# Altium PCB LED_Ring_80mm.pcbdoc (part 1 of 3)
Units mm, origin at the board's own origin, x right, y up, seen from the top; angles counter-clockwise.
Board outline 95 x 95 mm, 2 copper layers (Top Layer, Bottom Layer), stack 1.071 mm thick; 20 components, 18 nets, 2525 pads, 18 vias.
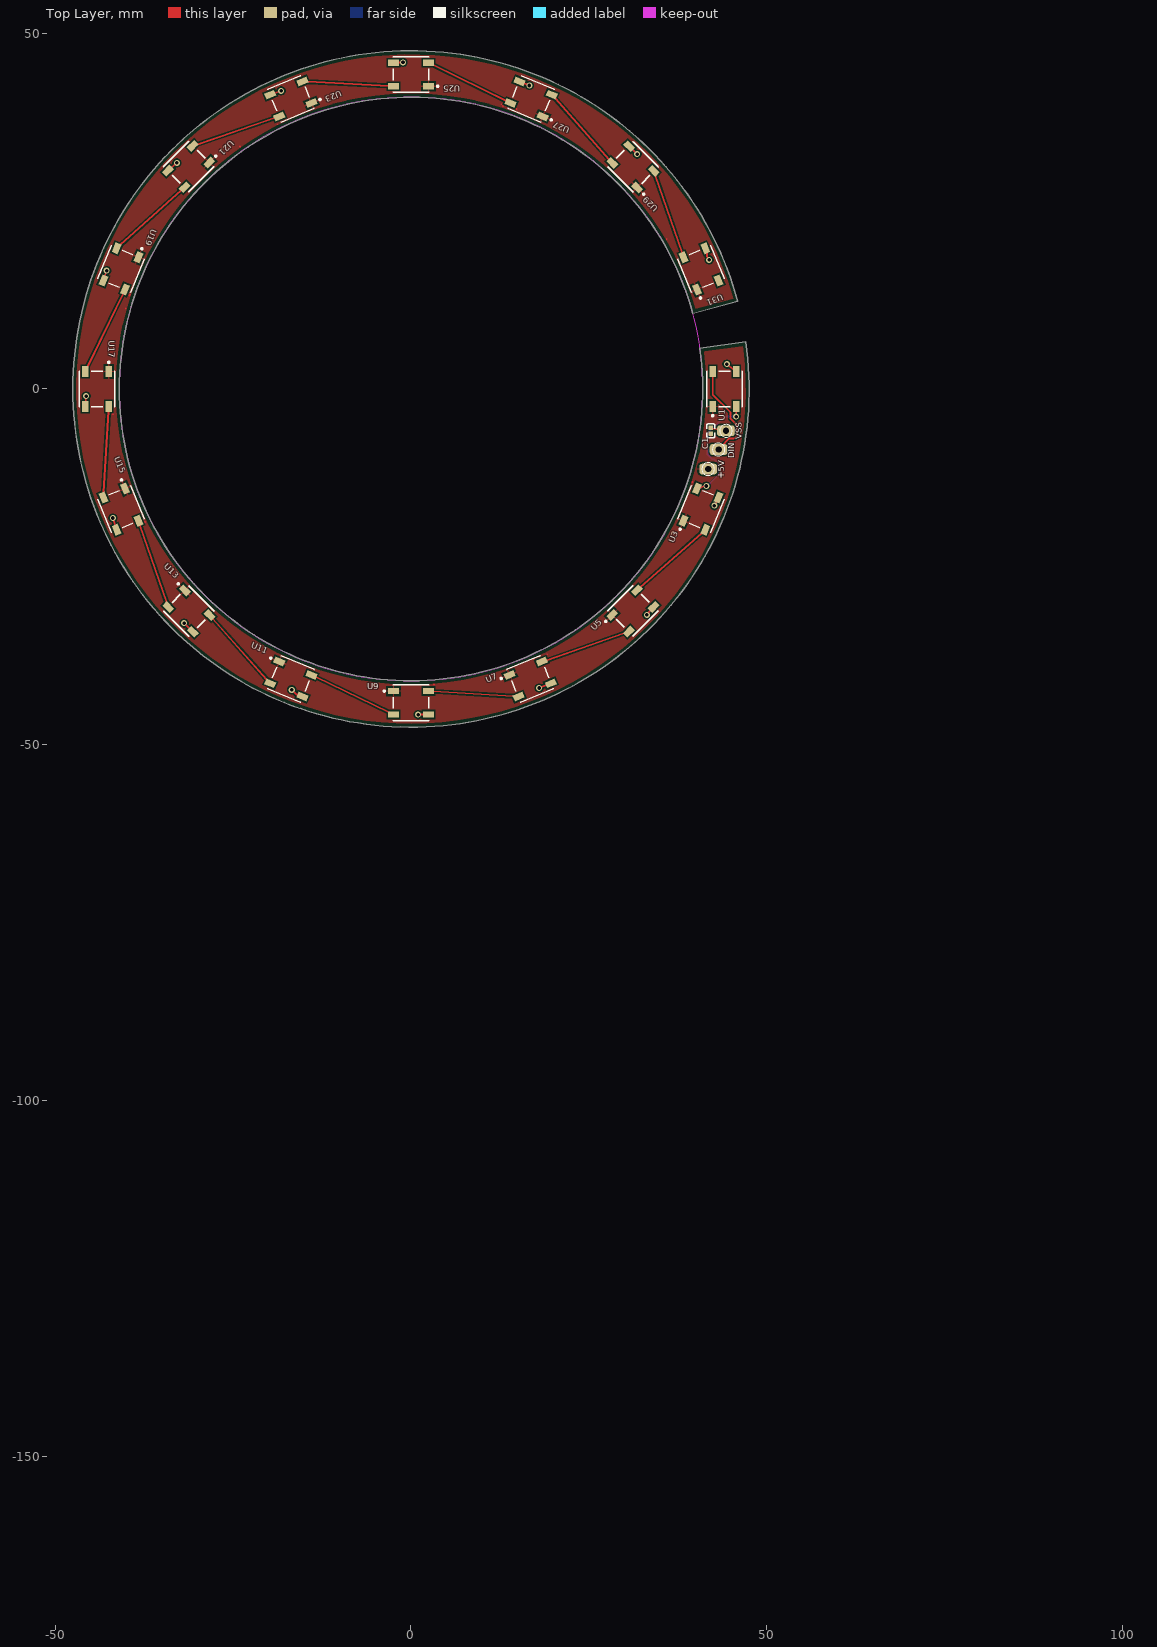
[diagram p0: Top Layer view]
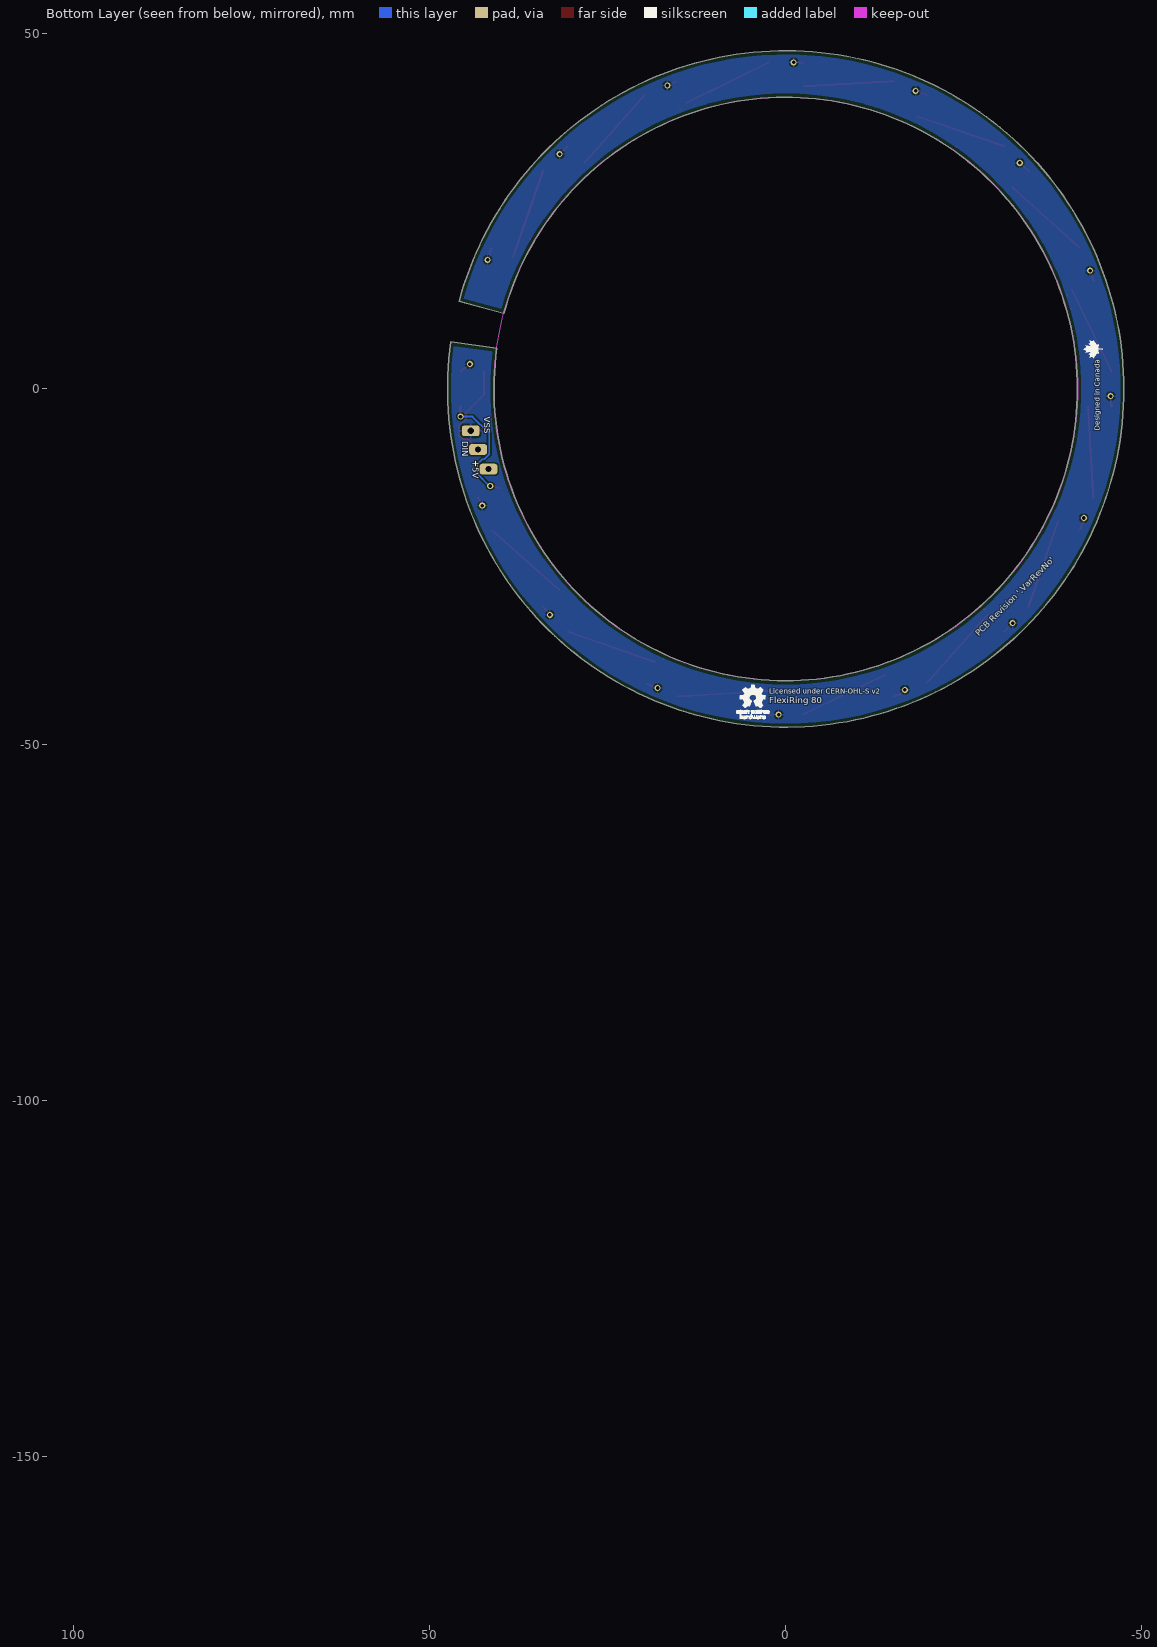
[diagram p1: Bottom Layer view, seen from below]
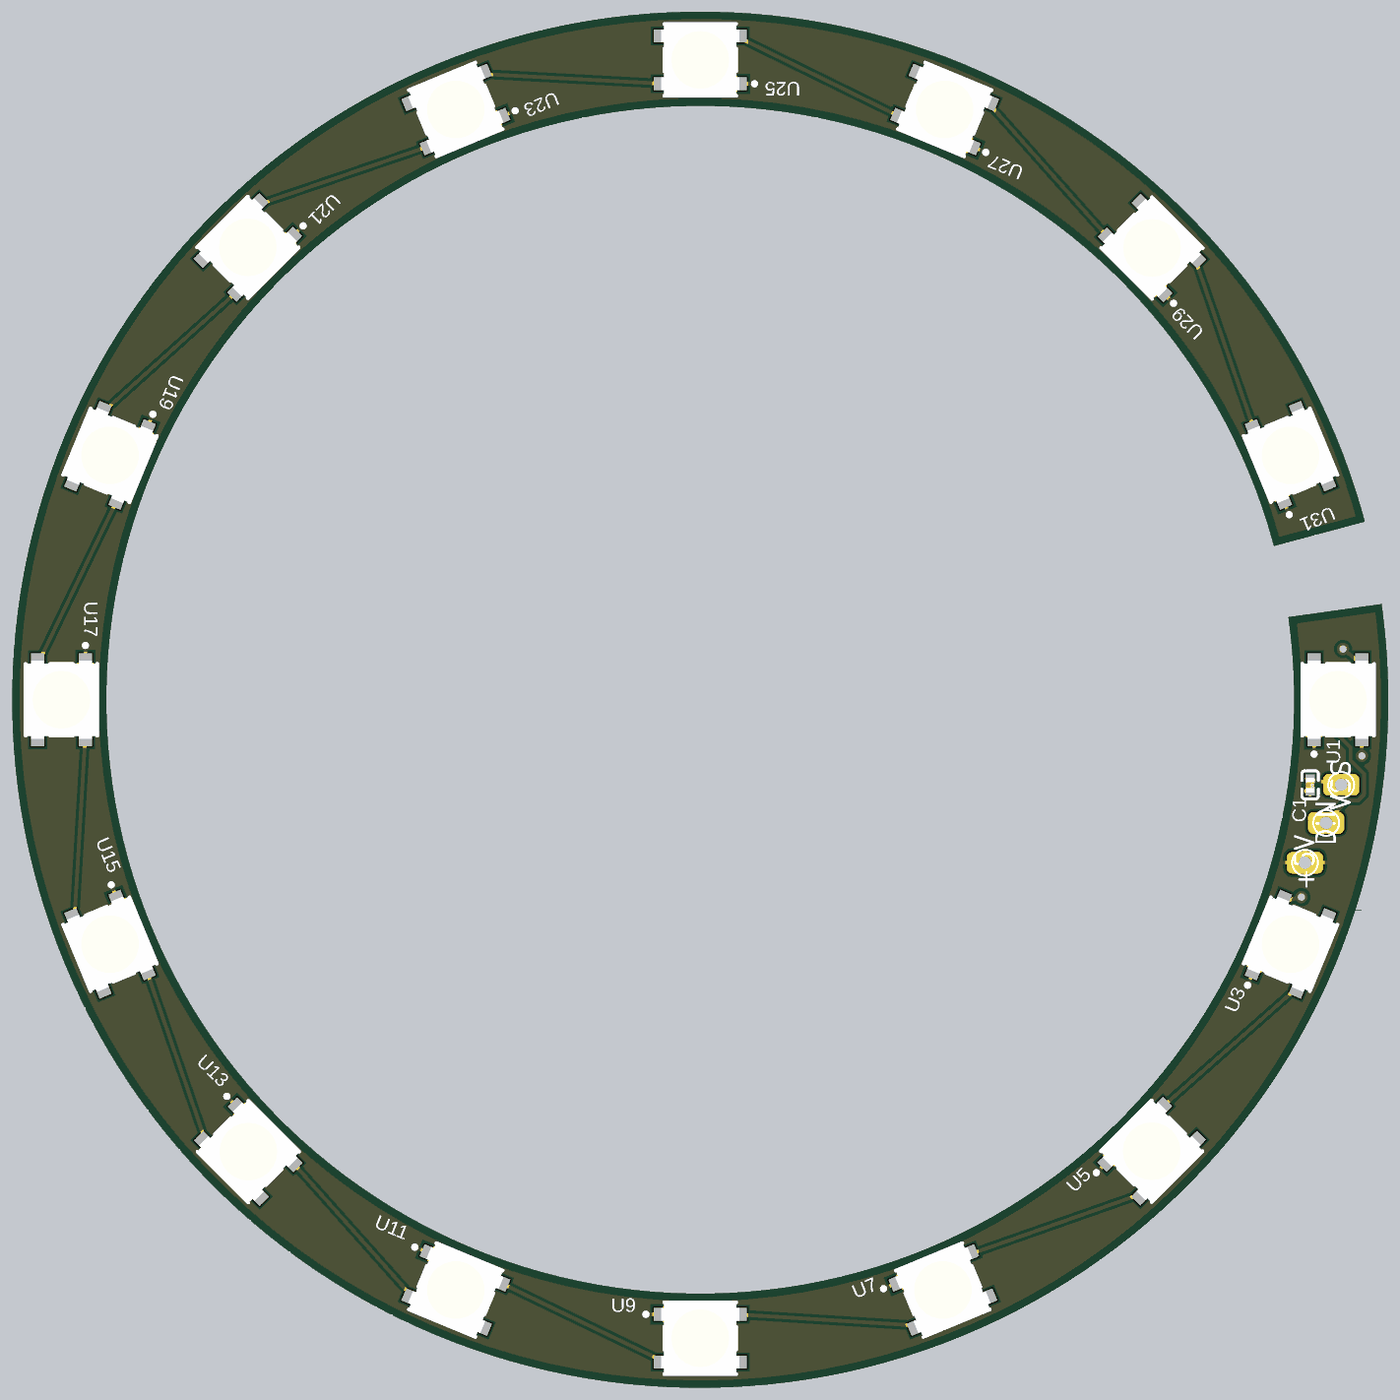
[diagram p4: 3D render of the assembled board from above, using the file's embedded part models]

## Layer stack, top to bottom
Top Solder: solder mask 0.0102, Solder Resist, Dk 3.5
Top Layer: signal copper 0.0356
Dielectric1: core 1, FR-4, Dk 4.8
Bottom Layer: signal copper 0.0356
Bottom Solder: solder mask 0.0102, Solder Resist, Dk 3.5

## Board outline
-47.5,0 ccw(c0,0) 47.038,6.611 40.569,5.702 cw(c0,0) -40.968,0 cw(c0,0) 39.572,10.603 45.881,12.294 ccw(c0,0)
cut-out: -41,0 ccw(c0,0) 0,-41 ccw(c0,0) 41,0 ccw(c0,0) 0,41 ccw(c0,0)

## Design rules (kind name [scope] priority, off if disabled: settings)
BoardOutlineClearance [OnLayer('Top Layer')] p1: gap=0.508 ignorepadtopadclearanceinfootprint=FALSE
BoardOutlineClearance BoardOutlineClearance_3 [OnLayer('GND')] p2: gap=0.508 ignorepadtopadclearanceinfootprint=FALSE
BoardOutlineClearance BoardOutlineClearance_2 [OnLayer('PWR')] p3: gap=0.508 ignorepadtopadclearanceinfootprint=FALSE
BoardOutlineClearance BoardOutlineClearance_1 [OnLayer('Bottom Layer')] p4: gap=0.508 ignorepadtopadclearanceinfootprint=FALSE
Clearance [All] p1: gap=0.203 ignorepadtopadclearanceinfootprint=TRUE except(0: SMDPad-Hole Fill-Hole Poly-Hole Region-Hole Text-Hole; 0.254: Arc-Text Arc-Hole Track-Text Track-Hole SMDPad-Text THPad-Text Via-Via Via-Text Fill-Fill Fill-Poly Fill-Region Fill-Text Poly-Poly Poly-Region Poly-Text Region-Region Region-Text Text-Text; 0.305: SMDPad-Via THPad-Via; 0.5: THPad-Hole Via-Hole; 0.508: SMDPad-SMDPad SMDPad-THPad THPad-THPad)
Clearance "Pad Clearance" [IsPad vs IsPad] p2: gap=0.254 ignorepadtopadclearanceinfootprint=TRUE except(0: Arc-Hole Track-Hole SMDPad-Hole THPad-Hole Via-Hole Fill-Hole Poly-Hole Region-Hole Text-Hole; 0.203: Arc-Arc Arc-Track Arc-Fill Arc-Poly Arc-Region Track-Track Track-Fill Track-Poly Track-Region SMDPad-Fill SMDPad-Poly SMDPad-Region THPad-Fill THPad-Poly THPad-Region Via-Fill Via-Poly Via-Region; 0.305: SMDPad-Via THPad-Via; 0.508: SMDPad-SMDPad SMDPad-THPad THPad-THPad)
DiffPairsRouting [All] p1: maxlimit=0.254 minlimit=0.203 mostfreqgap=0.203 toplayer_minwidth=0.152 toplayer_maxwidth=0.381 toplayer_prefwidth=0.254 bottomlayer_minwidth=0.152 bottomlayer_maxwidth=0.381 bottomlayer_prefwidth=0.305 maxuncoupledlength=12.7
HoleSize [All] p1: absolutevalues=TRUE maxlimit=5.08 minlimit=0.025 maxpercent=80.000 minpercent=20.000
MinimumAnnularRing [All] p1: minimumring=0.15
MinimumSolderMaskSliver [All] p1: minsoldermaskwidth=0.127
PolygonConnect [All] p1: connectstyle=Relief reliefconductorwidth=0.254 reliefentries=4 polygonreliefangle="90 Angle" airgapwidth=0.254
RoutingVias [All] p1: holewidth=0.711 width=1.27 viastyle="Through Hole" minholewidth=0.711 minwidth=1.27 maxholewidth=0.711 maxwidth=1.27 useviatemplates=TRUE viatemplateguid#1={C817A0E2-04CB-4ECB-B084-9101D9E3CECF} viatemplateguid#2={7798B31B-59B0-45B4-AC1F-ED072D77587F} viatemplateguid#3={B06DB8AE-4786-4B3A-A231-31325EBD98B5} viatemplatename#1=v85h50 viatemplatename#2=v127h71 viatemplatename#3=v65h30
SilkToSolderMaskClearance SilkscreenOverComponentPads [IsPad] p1: minsilkscreentomaskgap=0.254 clearancetoexposedcopper=TRUE
SolderMaskExpansion [All] p1: expansion=0.102 istentingtop=FALSE
ViasUnderSMD [All] p1: allowed=FALSE
Width [All] p1: maxlimit=5.08 minlimit=0.152 preferedwidth=0.203 minimp=50.000000 maximp=50.000000 favimp=50.000000
26 further rules are at their usual default settings.

## Components (designator, comment, footprint, x,y, rotation, side; value= is the part's Value field where it differs from the comment)
+5V "Test Loop" TP/LARGE 41.75,-11.25 r90 top
C1 "1.0uF" 0402_C 42.103,-5.875 r270 top
DIN "Test Loop" TP/LARGE 43.212,-8.5 r90 top
U1 "WS2812B-B/W" ADA-RGB-1655_V 44.03,0 r90 top
U3 "WS2812B-B/W" ADA-RGB-1655_V 40.75,-16.875 r67.5 top
U5 "WS2812B-B/W" ADA-RGB-1655_V 31.166,-31.166 r45 top
U7 "WS2812B-B/W" ADA-RGB-1655_V 16.75,-40.75 r22.5 top
U9 "WS2812B-B/W" ADA-RGB-1655_V 0,-44.075 r0 top
U11 "WS2812B-B/W" ADA-RGB-1655_V -16.875,-40.75 r337.5 top
U13 "WS2812B-B/W" ADA-RGB-1655_V -31.198,-31.198 r315 top
U15 "WS2812B-B/W" ADA-RGB-1655_V -40.75,-16.875 r292.5 top
U17 "WS2812B-B/W" ADA-RGB-1655_V -44.098,0 r270 top
U19 "WS2812B-B/W" ADA-RGB-1655_V -40.75,16.875 r247.5 top
U21 "WS2812B-B/W" ADA-RGB-1655_V -31.233,31.233 r225 top
U23 "WS2812B-B/W" ADA-RGB-1655_V -16.875,40.75 r202.5 top
U25 "WS2812B-B/W" ADA-RGB-1655_V 0,44.175 r180 top
U27 "WS2812B-B/W" ADA-RGB-1655_V 16.875,40.75 r157.5 top
U29 "WS2812B-B/W" ADA-RGB-1655_V 31.191,31.191 r135 top
U31 "WS2812B-B/W" ADA-RGB-1655_V 40.75,16.875 r112.5 top
VSS "Test Loop" TP/LARGE 44.25,-5.875 r90 top

## Footprints (in the part's own frame and the unit in brackets; to place one, negate y for a bottom-side part, rotate by r counter-clockwise, add the part's x,y. Pads: shape width x height; smd on the part's side, far side on the other; paste and mask are expansions set on the pad)
0402_C [mm]
  rect 0.6x0.65 smd mask+0.051: 1(-0.425,0) 2(0.425,0)
  silkscreen extent -0.97,-0.58 0.98,0.58, body extent -0.48,-0.3 0.52,0.3, height 0.2
ADA-RGB-1655_V [mm] "SMD, 4-Leads, Body 5x5mm"
  rect 1.5x0.9 smd: 1(-2.45,1.65) 2(-2.45,-1.65) 3(2.45,-1.65) 4(2.45,1.65)
  silkscreen extent -3.87,-2.5 2.5,2.5, body extent -2.7,-2.5 2.7,2.5, height 1.68
TP/LARGE [mm]
  rrect50% 1.5x2.5 hole 0.889: 1(0,0)
  silkscreen extent -0.89,-0.89 0.89,0.89

## Part data
+5V DIN VSS: library part TL_5017, "PC TEST POINT MINIATURE", Color=White, Manufacturer 1="Keystone Electronics", Manufacturer Part Number 1=5017, Package Quantity=5000, Supplier Part Number 1=36-5017CT-ND, ComponentLink1Description=https://datasheet.ciiva.com/18456/5017-18456885.pdf?src-supplier=Digi-Key, ComponentLink1URL=https://datasheet.ciiva.com/18456/5017-18456885.pdf?src-supplier=Digi-Key, ComponentLink2Description=https://datasheet.ciiva.com/18456/5017-18456886.pdf?src-supplier=Digi-Key, ComponentLink2URL=https://datasheet.ciiva.com/18456/5017-18456886.pdf?src-supplier=Digi-Key, ComponentLink3Description=https://datasheet.ciiva.com/18456/5017-18456887.pdf?src-supplier=Digi-Key, ComponentLink3URL=https://datasheet.ciiva.com/18456/5017-18456887.pdf?src-supplier=Digi-Key, Contact Material=Bronze, Contact Plating=Tin, Depth=1.01mm, Lead Free="Lead Free", Length=2.66mm, Material=Bronze, Mount="Surface Mount", Number of Ports=1, Orientation=Straight, Packaging="Tape and Reel", Pricing 1="1 = 0.47000, 10 = 0.44100, 25 = 0.37800, 50 = 0.32140, 100 = 0.30880, 250 = 0.27732, 500 = 0.26472, 1000 = 0.22061, 2500 = 0.20170 (USD)", REACH SVHC="No SVHC", RoHS=Yes, Stock 1=203311, Supplier 1=Digi-Key, Termination=Solder
C1: library part "0402 1.0uF (105) 10% 25V", "Chip capacitor", Capacitance=1uF, Manufacturer="Samsung Electro-Mechanics", Package=0402, PartNumber=CL05A105KA5NQNC, SuppliersPartNumber=C52923, Tolerance=10%, VOLTAGE=25V, ComponentLink1Description="Supplier link", ComponentLink1URL=http://www.szlcsc.com/product/details_53938.html, Supplier=LC
U1 U3 U5 U7 U9 U11 U13 U15 U17 U19 U21 U23 U25 U27 U29 U31: library part CMP-2000-05026-1, "Intelligent Control LED Integrated Light Source, 3.5 to 5.3 V, -25 to 80 degC, 4-Pin SMD, RoHS, Tape and Reel", Manufacturer=Worldsemi, Package Description="4-Pin Surface Mount Device, Body 5 x 5 mm", SuppliersPartNumber=C2874885, Part_Number=WS2812B-B/W